# EAGLE board StyroCutter-556-heatsink-5V-alt (EAGLE 7.6.0)

Size 160.51 x 99.06 mm. Coordinates in mm from the lower left corner, seen from the top.
Outline: 0.51,0 160.51,0 160,99.06 0,99.06 0.51,0
Copper layers (1*16): Top 0.035mm / dielectric 1.5mm / Bottom 0.035mm
Design rules "default": minimum track width 10mil, minimum drill 24mil, track to track 8mil, track to pad 8mil, pad to pad 8mil, via to via 8mil, smd to smd 8mil, copper to edge 40mil, drill to drill 8mil, minimum pad ring 10mil, minimum via ring 8mil, stop-mask expansion 4mil, vias tented up to drill 0mil, thermal gap 10mil
Net classes: 0 GND: width 1.219 mm, clearance 0.635 mm

## Footprints (pad centres in the part's own frame; a part is rotated, then mirrored left to right if it is on the bottom)
E5-4 = drill 0.813 pad 1.905: + -2.54,0 | drill 0.813 pad 1.905 octagon: - 2.54,0
C075-032X103 = drill 0.914 octagon: 1 -3.81,0; 2 3.81,0
E2,5-5 = drill 0.813 pad 1.6: + -1.27,0 | drill 0.813 pad 1.6 octagon: - 1.27,0
C050-020X036 = drill 0.813 octagon: 1 0,2.54; 2 0,-2.54
C050-024X044 = drill 0.813 octagon: 1 -2.54,0; 2 2.54,0
C050-025X075 = drill 0.813 octagon: 1 -2.54,0; 2 2.54,0
DO34-5 = drill 0.813 octagon: A 2.54,0; C -2.54,0
DIL14 = drill 0.813 long: 1 -7.62,-3.81; 2 -5.08,-3.81; 3 -2.54,-3.81; 4 0,-3.81; 5 2.54,-3.81; 6 5.08,-3.81; 7 7.62,-3.81; 8 7.62,3.81; 9 5.08,3.81; 10 2.54,3.81; 11 0,3.81; 12 -2.54,3.81; 13 -5.08,3.81; 14 -7.62,3.81
TO220H = drill 1.118 long: 1 -2.54,-10.16; 2 0,-10.16; 3 2.54,-10.16 | hole 3.302: 0,4.826
CON-MIGROS-3PIN = drill 1.3 pad 3.048 octagon: 1 -5.08,0; 2 0,0; 3 5.08,0
PC16S = drill 1.2 long: 1A -5.08,2.54; 1E 5.08,2.54; 1S 0,2.54
TO220BV = drill 1.016 long: D 0,-2.54; G -2.54,-2.54; S 2.54,-2.54
0204/12 = drill 0.813 octagon: 1 -6.35,0; 2 6.35,0
0204/10 = drill 0.813 octagon: 1 -5.08,0; 2 5.08,0
0202/2V = drill 0.813 octagon: 1 0,-1.27; 2 0,1.27
TO92-CBE = drill 0.7 pad 1.422: B 0,0; C -2.54,0; E 2.54,0
SLSW-1P2T-V = drill 1.118 pad 1.778 octagon: 1 -5.08,-2.54; 2 -5.08,0; 3 -5.08,2.54
LED-3MM-V = drill 0.8 octagon: A 0,1.27; C 0,-1.27

## Placement (x,y rotation side)
C1  10uF  [E5-4]  64.01,91.44 180 top
C2  10nF  [C075-032X103]  52.58,74.93 0 top
C3  47uF/35V  [E2,5-5]  28.45,87.63 90 top
C4  100nF  [C050-020X036]  64.01,86.36 90 top
C5  0.33uF  [C050-024X044]  28.45,93.98 270 top
C6  0.1uF  [C050-025X075]  33.53,83.82 180 top
D1  1N4148  [DO34-5]  64.01,81.28 0 top
D2  1N4148  [DO34-5]  64.01,71.12 180 top
IC1  NE556  [DIL14]  34.8,71.12 270 top
IC2  7805T  [TO220H]  43.69,91.44 270 top
J2  PCON3_MIGROS  [CON-MIGROS-3PIN]  18.29,63.5 0 top
POT  4.7k  [PC16S]  74.17,76.2 90 top
Q1  IRFB3207ZPbF  [TO220BV]  10.67,78.74 90 top
R1  10k  [0204/12]  44.96,72.39 90 top
R2  1k  [0204/10]  64.01,63.5 0 top
R3  1k  [0202/2V]  42.42,77.47 0 top
T1  BC547  [TO92-CBE]  56.39,66.04 270 top
U$1  SL-SW-1P-2T-V  [SLSW-1P2T-V]  76.71,88.9 0 top
U$2  AQ  [AQ_HS_3A]  10.67,78.74 90 top
U$3  PCON3  [CON-MIGROS-3PIN]  18.29,93.98 180 top
U$4  LED-3MM-V  [LED-3MM-V]  71.63,64.77 180 bottom

## Library data of the parts
C1 C3 = rcl
C2 C4-C6 = c
D1 D2 = d
IC1 = ne555-556
IC2 = linear
J2 U$3 = print-conn
POT = piher-pt16
Q1 = power-mosfet
R1-R3 = r
T1 = t
U$1 = sw
U$2 = heatsink
U$4 = led

## Nets
+12V: C5.1 IC2.1 J2.3 U$3.1
GND: C1.- C2.1 C3.- C4.1 C5.2 C6.2 IC1.3 IC1.4 IC1.6 IC1.7 IC2.2 Q1.S U$3.2 U$3.3 U$4.C
N$1: D2.C POT.1A
N$2: D1.A POT.1E
N$3: IC1.9 R1.1 T1.B
N$4: C4.2 U$1.3
N$5: C2.2 IC1.11
N$6: IC1.13 POT.1S R3.1
N$7: Q1.G R2.1 T1.E
N$8: D1.C D2.A IC1.8 IC1.12 U$1.2
N$9: C1.+ U$1.1
N$11: R2.2 U$4.A
PWM: J2.1 J2.2 Q1.D
V+: C3.+ C6.1 IC1.10 IC1.14 IC2.3 R1.2 R3.2 T1.C

## Tracks (layer width: path | path; a pad name or v marks a point on that pad's centre or on a via)
+12V  (3 unrouted)
GND  (14 unrouted)
N$1  (1 unrouted)
N$2  (1 unrouted)
N$3  (2 unrouted)
N$4  (1 unrouted)
N$5  (1 unrouted)
N$6  (2 unrouted)
N$7  (2 unrouted)
N$8  (4 unrouted)
N$9  (1 unrouted)
N$11  (1 unrouted)
PWM  (2 unrouted)
V+  (7 unrouted)